# EAGLE board LM317 (EAGLE 7.6.0)
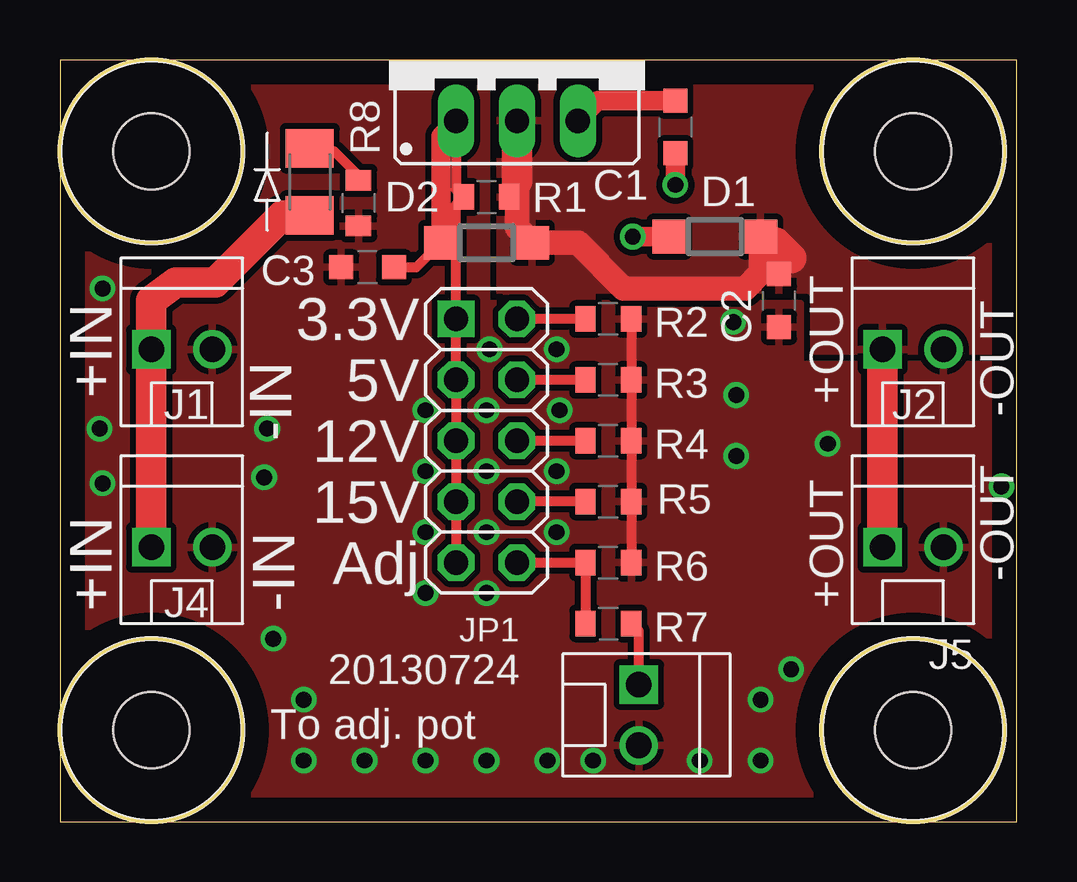
[diagram p0: board, top side]
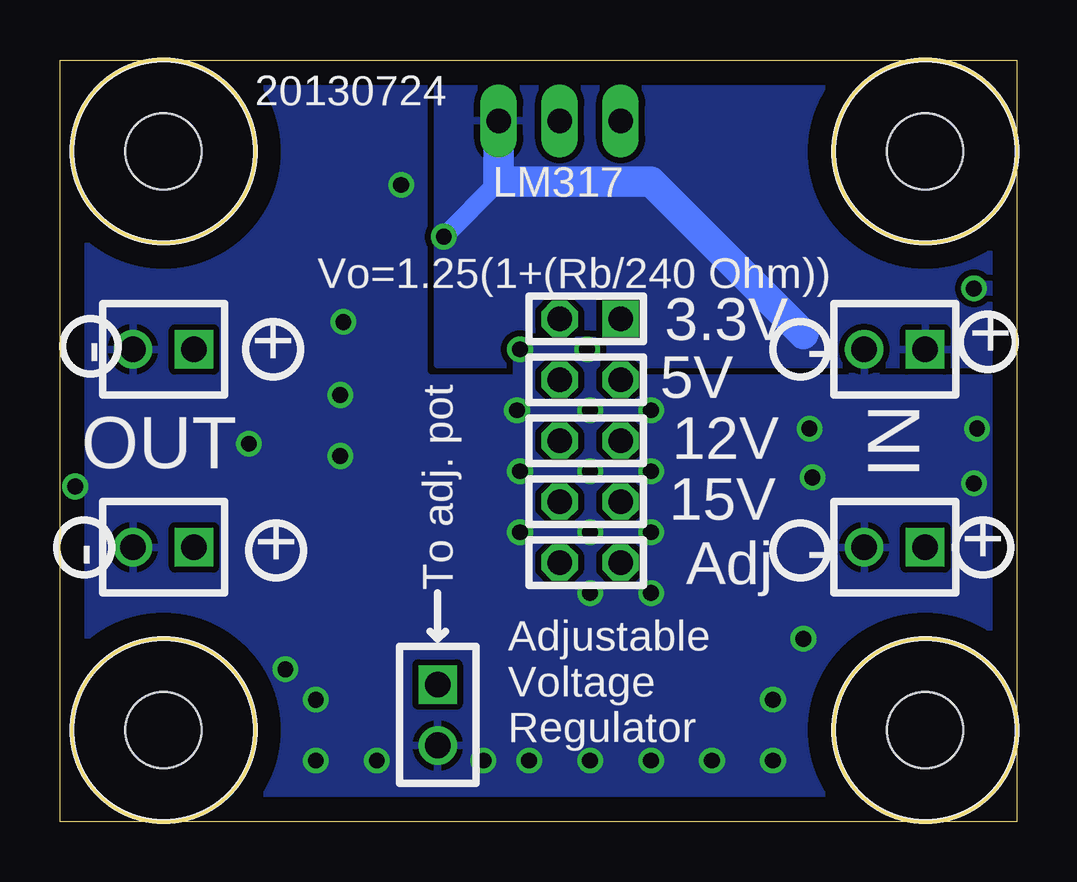
[diagram p1: board, bottom side, seen from below]

Size 39.88 x 31.75 mm. Coordinates in mm from the lower left corner, seen from the top.
Outline: 0,0 39.88,0 39.88,31.75 0,31.75 0,0
Copper layers (1*16): Top 0.035mm / dielectric 1.5mm / Bottom 0.035mm
Design rules "default": minimum track width 10mil, minimum drill 24mil, track to track 8mil, track to pad 8mil, pad to pad 8mil, via to via 8mil, smd to smd 8mil, copper to edge 40mil, drill to drill 8mil, minimum pad ring 10mil, minimum via ring 8mil, stop-mask expansion 4mil, vias tented up to drill 0mil, thermal gap 10mil

## Footprints (pad centres in the part's own frame; a part is rotated, then mirrored left to right if it is on the bottom)
0805_PANASONIC = smd 1 x 1: 1 -1.1,0; 2 1.1,0
SOD123 = smd 1.4 x 1.4: A 1.9,0; C -1.9,0
317TS = drill 1.016 long: 1 -2.54,-2.54; 2 0,-2.54; 3 2.54,-2.54
640456-2 = drill 1.067 square: 1 1.27,0 | drill 1.067: 2 -1.27,0
2X05 = drill 1.016 square: 1 -5.08,-1.27 | drill 1.016 octagon: 2 -5.08,1.27; 3 -2.54,-1.27; 4 -2.54,1.27; 5 0,-1.27; 6 0,1.27; 7 2.54,-1.27; 8 2.54,1.27; 9 5.08,-1.27; 10 5.08,1.27
M1206 = smd 1.6 x 2: 1 -1.4,0; 2 1.4,0
0805_MARISS = smd 0.846 x 1.059: 1 -0.953,0; 2 0.953,0
440 = hole 3.175: 0,0

## Placement (x,y rotation side)
C1  0.1uF  [0805_PANASONIC]  25.65,28.96 270 top
C2  1uF  [0805_PANASONIC]  29.97,21.72 270 top
C3  10uF  [0805_PANASONIC]  12.83,23.11 180 top
D1  MBR0520LT  [SOD123]  27.3,24.38 0 top
D2  MBR0520LT  [SOD123]  17.78,24.13 180 top
IC1  [317TS]  19.05,31.75 0 top
J1  Vin  [640456-2]  5.08,19.68 180 top
J2  Vout  [640456-2]  35.56,19.68 180 top
J3  To POT  [640456-2]  24.13,4.45 90 top
J4  Vin  [640456-2]  5.08,11.43 180 top
J5  Vout  [640456-2]  35.56,11.43 180 top
JP1  [2X05]  17.78,15.88 270 top
LED1  [M1206]  10.41,26.67 90 top
R1  240 Ohm  [0805_MARISS]  17.78,26.04 0 top
R2  393.6 Ohm  [0805_MARISS]  22.86,20.95 180 top
R3  720 Ohm  [0805_MARISS]  22.86,18.41 180 top
R4  2064 Ohm  [0805_MARISS]  22.86,15.88 180 top
R5  2640 Ohm  [0805_MARISS]  22.86,13.34 180 top
R6  [0805_MARISS]  22.86,10.79 180 top
R7  [0805_MARISS]  22.86,8.26 0 top
R8  240 Ohm  [0805_MARISS]  12.45,25.78 90 top
U$1  [440]  35.56,27.94 0 top
U$2  [440]  3.81,3.81 0 top
U$3  [440]  3.81,27.94 0 top
U$4  [440]  35.56,3.81 0 top

## Library data of the parts
C1-C3 R1-R8 = MyComponents
D1 D2 = diode
IC1 = v-reg
J1-J5 = MyAmprpt
JP1 = Mypinhead
LED1 = MyLED
U$1-U$4 = myholes

## Nets
AGND: C1.2 C2.2 C3.2 J1.2 J2.2 J3.2 J4.2 J5.2 R2.1 R3.1 R4.1 R5.1 R6.1 R8.1
N$2: J3.1 R7.2
N$3: C3.1 D2.A IC1.1 JP1.1 JP1.3 JP1.5 JP1.7 JP1.9 R1.1
N$4: JP1.10 R6.2 R7.1
N$5: JP1.8 R5.2
N$6: JP1.6 R4.2
N$7: JP1.4 R3.2
N$8: LED1.2 R8.2
N$9: JP1.2 R2.2
VIN: C1.1 D1.C IC1.3 J1.1 J4.1 LED1.1
VOUT: C2.1 D1.A D2.C IC1.2 J2.1 J5.1 R1.2

## Tracks (layer width: path | path; a pad name or v marks a point on that pad's centre or on a via)
AGND  (via drill 0.66)
  Top 0.406: R2.1 R3.1 R4.1 R5.1 R6.1
  Top 0.813: C1.2 v25.65,26.54
  Bottom 0.305: v25.65,26.54 25.4,26.67
  other vias: 10.16,2.54 12.7,2.54 15.24,2.54 29.21,2.54 39.24,13.97 32,15.75 28.07,20.83 28.19,17.78 1.78,22.23 28.19,15.24 15.24,17.14 15.24,14.61 15.24,12.06 15.24,9.53 17.91,19.68 17.78,17.14 17.78,14.61 17.78,12.06 17.78,9.53 20.7,12.06 20.7,14.61 20.83,17.14 20.7,19.68 17.78,2.54 20.32,2.54 22.23,2.54 26.67,2.54 30.48,6.35 29.21,5.08 1.78,14.1 1.65,16.38 8.64,16.38 8.51,14.35 10.16,5.08 8.89,7.62
  pour Top (isolate 0.254): 0,0 39.88,0 39.88,19.05 30.86,19.05 30.86,21.59 17.78,21.59 17.78,31.75 0,31.75
  pour Bottom (isolate 0.254, rank 2): 0,0 39.88,0 39.88,31.75 0,31.75
N$2
  Top 0.406: J3.1 24.13,7.94 R7.2
N$3
  Top 0.406: IC1.1 16.51,26.35 R1.1 16.51,25.72 JP1.1 JP1.3 JP1.5 JP1.7 JP1.9 | C3.1 14.86,23.11 D2.A
  Top 0.813: D2.A 15.88,28.58 IC1.1
N$4
  Top 0.406: JP1.10 R6.2 R7.1
N$5
  Top 0.406: R5.2 JP1.8
N$6
  Top 0.406: R4.2 JP1.6
N$7
  Top 0.406: R3.2 JP1.4
N$8
  Top 0.406: R8.2 12.38,26.99 11.43,27.94 10.8,27.94 LED1.2
N$9
  Top 0.406: R2.2 JP1.2
VIN  (via drill 0.66)
  Top 0.813: D1.C v23.88,24.38 | C1.1 22.44,30.06 IC1.3
  Top 1.27: J4.1 J1.1 3.81,21.72 4.83,22.48 6.48,22.48 9.27,25.27 LED1.1
  Bottom 0.813: v23.88,24.38 21.59,26.67
  Bottom 1.27: 8.89,20.32 15.24,26.67 21.59,26.67 IC1.3
  pour Bottom (isolate 0.254): 0,31.75 24.13,31.75 24.13,19.05 0,19.05
VOUT
  Top 0.406: 19.05,26.67 19.05,26.35 R1.2 | C2.1 29.38,23.96 D1.A
  Top 0.813: 29.21,22.86 29.2,22.86 D1.A
  Top 1.016: 29.21,22.86 29.21,24.13 | 19.05,26.67 19.05,24.76 D2.C 21.59,24.13 23.5,22.23 28.57,22.23 29.2,22.86
  Top 1.27: IC1.2 19.05,26.67 | 29.21,24.13 29.84,24.13 30.48,23.5 | J2.1 J5.1
  pour Top (isolate 0.254, rank 2): 16.51,31.75 16.51,21.59 30.86,21.59 30.86,19.05 39.88,19.05 39.88,31.75

## Text on the board
tPlace: 3.3V | 5V | +IN | 12V | +OUT | -OUT | -IN | 15V | Adj | -OUT | +IN | -IN | +OUT | 20130724 | To adj. pot
bPlace: 20130724 | LM317 | Vo=1.25(1+(Rb/240 Ohm)) | 3.3V | + | - | + | 5V | - | IN | 12V | OUT | 15V | + | + | - | Adj | - | To adj. pot | Adjustable / Voltage / Regulator